# EAGLE board schema_7 (EAGLE 9.1.0)
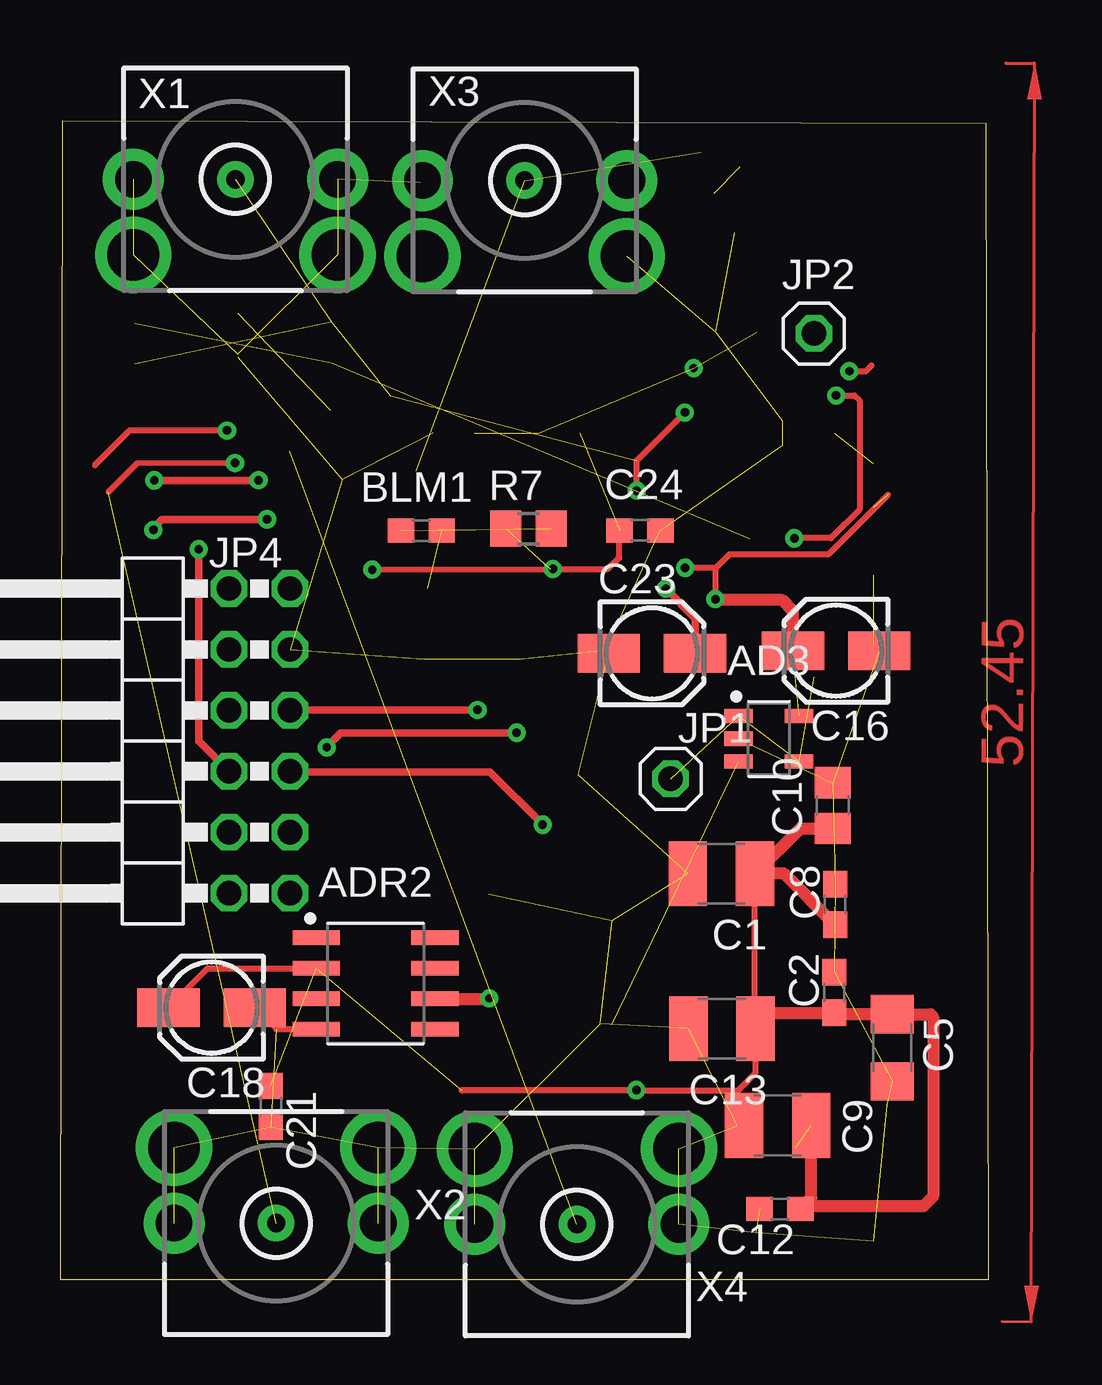
[diagram p0: board, top side]
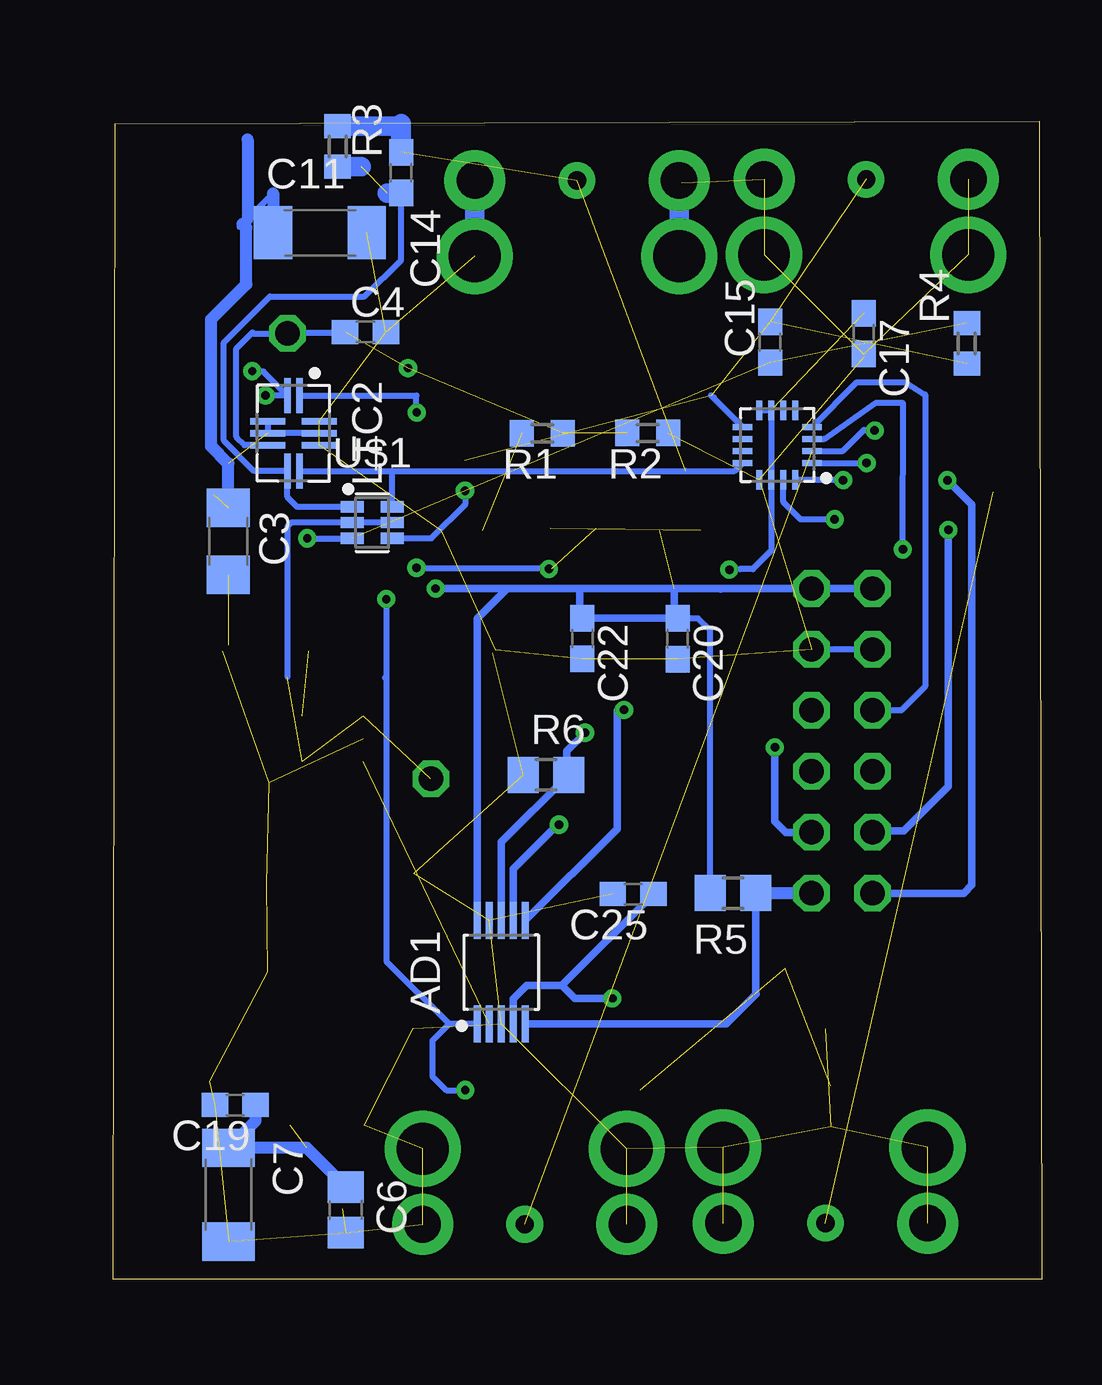
[diagram p1: board, bottom side, seen from below]

Size 38.69 x 48.26 mm. Coordinates in mm from the lower left corner, seen from the top.
Outline: 0,0 38.69,0 38.59,48.16 0.1,48.26 0,0
Copper layers (1*16): Top 0.035mm / dielectric 1.5mm / Bottom 0.035mm
Design rules "default": minimum track width 6mil, minimum drill 0.35mm, track to track 6mil, track to pad 6mil, pad to pad 6mil, via to via 6mil, smd to smd 6mil, copper to edge 40mil, drill to drill 6mil, minimum pad ring 10mil, minimum via ring 8mil, stop-mask expansion 4mil, vias tented up to drill 0mil, thermal gap 10mil

## Footprints (pad centres in the part's own frame; a part is rotated, then mirrored left to right if it is on the bottom)
SOP50P490X110-10 = smd 1.55 x 0.297: 1 -2.156,1; 2 -2.156,0.5; 3 -2.156,0; 4 -2.156,-0.5; 5 -2.156,-1; 6 2.156,-1; 7 2.156,-0.5; 8 2.156,0; 9 2.156,0.5; 10 2.156,1
SOT95P280X145-5 = smd 1.186 x 0.597: 1 -1.264,0.95; 2 -1.264,0; 3 -1.264,-0.95; 4 1.264,-0.95; 5 1.264,0.95
SOIC127P600X175-8 = smd 1.968 x 0.599: 1 -2.473,1.905; 2 -2.473,0.635; 3 -2.473,-0.635; 4 -2.473,-1.905; 5 2.473,-1.905; 6 2.473,-0.635; 7 2.473,0.635; 8 2.473,1.905
C1608 = smd 1.1 x 1: 1 -0.85,0; 2 0.85,0
C1210 = smd 1.6 x 2.7: 1 -1.4,0; 2 1.4,0
C0603 = smd 1.1 x 1: 1 -0.85,0; 2 0.85,0
C1206 = smd 1.6 x 1.8: 1 -1.4,0; 2 1.4,0
C0805 = smd 1.3 x 1.5: 1 -0.95,0; 2 0.95,0
C1808 = smd 1.6 x 2.2: 1 -1.95,0; 2 1.95,0
153CLV-0405 = smd 2.6 x 1.6: + 1.8,0; - -1.8,0
1X01 = drill 1.016 octagon: 1 0,0
2X06/90 = drill 1.016 octagon: 1 -6.35,-6.35; 2 -6.35,-3.81; 3 -3.81,-6.35; 4 -3.81,-3.81; 5 -1.27,-6.35; 6 -1.27,-3.81; 7 1.27,-6.35; 8 1.27,-3.81; 9 3.81,-6.35; 10 3.81,-3.81; 11 6.35,-6.35; 12 6.35,-3.81
QFN50P350X250X80-10 = smd 1.459 x 0.27: 1 -1.574,0.25; 2 -1.574,-0.25; 6 1.574,-0.25; 7 1.574,0.25 | smd 0.27 x 1.459: 3 -0.5,-1.074; 4 0,-1.074; 5 0.5,-1.074; 8 0.5,1.074; 9 0,1.074; 10 -0.5,1.074
R0603 = smd 1 x 1.1: 1 -0.85,0; 2 0.85,0
R0805 = smd 1.3 x 1.5: 1 -0.95,0; 2 0.95,0
QFN50P300X300X90-16 = smd 0.81 x 0.25: 1 -1.445,0.75; 2 -1.445,0.25; 3 -1.445,-0.25; 4 -1.445,-0.75; 9 1.445,-0.75; 10 1.445,-0.25; 11 1.445,0.25; 12 1.445,0.75 | smd 0.25 x 0.81: 5 -0.75,-1.445; 6 -0.25,-1.445; 7 0.25,-1.445; 8 0.75,-1.445; 13 0.75,1.445; 14 0.25,1.445; 15 -0.25,1.445; 16 -0.75,1.445
SOTFL65P210X100-6 = smd 0.956 x 0.472: 1 -0.836,0.65; 2 -0.836,0; 3 -0.836,-0.65; 4 0.836,-0.65; 5 0.836,0; 6 0.836,0.65
SMA-142-0701-871 = drill 0.762 pad 1.524: 1 0,0 | drill 1.524 pad 2.54: 2@1 -4.255,0; 2@2 4.255,0 | drill 2.159 pad 2.794: 2@3 -4.255,-3.15; 2@4 4.255,-3.15

## Placement (x,y rotation side)
AD1  0  [SOP50P490X110-10]  22.51,12.79 90 bottom
AD3  0  [SOT95P280X145-5]  29.54,22.53 0 top
ADR2  ADR441N  [SOIC127P600X175-8]  13.15,12.33 0 top
BLM1  0  [C1608]  15.06,31.21 180 top
C1  10u  [C1210]  27.55,16.9 180 top
C2  0.1u  [C0603]  32.27,11.96 90 top
C3  1000p  [C1206]  33.89,30.76 270 bottom
C4  0.1u  [C0603]  28.17,39.47 0 bottom
C5  1000p  [C1206]  34.68,9.65 270 top
C6  100p  [C0805]  29,2.89 270 bottom
C7  0.01u  [C1808]  33.88,3.53 270 bottom
C8  0.1u  [C0603]  32.3,15.62 90 top
C9  0.47u  [C1210]  29.9,6.41 180 top
C10  100p  [C0805]  32.2,19.74 90 top
C11  0.01u  [C1808]  30.07,43.62 0 bottom
C12  0.1u  [C0603]  30,2.93 180 top
C13  0.47u  [C1210]  27.58,10.45 180 top
C14  10p  [C0603]  26.69,46.12 90 bottom
C15  10p  [C0603]  11.31,39.05 90 bottom
C16  10u  [153CLV-0405]  32.33,26.19 180 top
C17  0.1u  [C0603]  7.42,39.41 270 bottom
C18  0.1u  [153CLV-0405]  6.32,11.32 180 top
C19  1u  [C0603]  33.6,7.27 180 bottom
C20  1u  [C0603]  15.17,26.69 270 bottom
C21  0.1u  [C0603]  8.78,7.21 270 top
C22  0.1u  [C0603]  19.14,26.7 270 bottom
C23  10u  [153CLV-0405]  24.67,26.09 0 top
C24  1u  [C0603]  24.17,31.22 0 top
C25  0.1u  [C0603]  17.02,16.05 180 bottom
JP1  0  [1X01]  25.45,20.86 180 top
JP2  0  [1X01]  31.41,39.42 0 top
JP4  0  [2X06/90]  3.23,22.44 90 top
LTC2  0  [QFN50P350X250X80-10]  31.18,35.26 270 bottom
R1  500  [R0603]  20.8,35.26 180 bottom
R2  500  [R0603]  16.41,35.27 180 bottom
R3  500  [R0603]  29.33,47.21 90 bottom
R4  500  [R0603]  3.12,39.01 270 bottom
R5  10k  [R0805]  12.86,16.09 180 bottom
R6  10k  [R0805]  20.65,21.03 0 bottom
R7  1.5  [R0805]  19.52,31.29 180 top
SY1  SY89873LN  [QFN50P300X300X90-16]  11.01,34.77 180 bottom
U$1  UM6K34N1  [SOTFL65P210X100-6]  27.9,31.54 0 bottom
X1  SMA-142-0701-871/880  [SMA-142-0701-871]  7.31,45.85 0 top
X2  SMA-142-0701-871/880  [SMA-142-0701-871]  9.01,2.34 180 top
X3  SMA-142-0701-871/880  [SMA-142-0701-871]  19.36,45.8 0 top
X4  SMA-142-0701-871/880  [SMA-142-0701-871]  21.54,2.29 180 top

## Library data of the parts
AD1 AD3 ADR2 BLM1 LTC2 SY1 U$1 = mylibrary
C1-C3 C5-C13 = rcl
C4 C14 C15 C17-C22 C24 C25 = rcl; SPICEPREFIX: C
C16 C23 R3 R4 = resistor
JP1 JP2 JP4 = pinhead
R1 R2 R5-R7 = rcl; SPICEPREFIX: R
X1-X4 = con-coax; MF: JOHNSON COMPONENTS; MPN: 142-0701-871; OC_FARNELL: 1339835; OC_NEWARK: 91B6105

## Nets
0: AD1.3 AD1.9 AD3.2 ADR2.4 C1.2 C2.2 C3.2 C4.2 C5.2 C6.2 C7.2 C8.2 C9.2 C10.2 C11.2 C12.2 C13.2 C16.- C17.2 C18.- C19.2 C20.2 C21.2 C22.2 C23.- C24.2 C25.2 JP4.9 JP4.10 LTC2.8 LTC2.10 R2.1 R6.1 SY1.13 X1.2@1 X1.2@2 X1.2@3 X1.2@4 X2.2@1 X2.2@2 X2.2@3 X2.2@4 X3.2@1 X3.2@2 X3.2@3 X3.2@4 X4.2@1 X4.2@2 X4.2@3 X4.2@4
3IN+: AD1.2 AD3.3
+3V3: AD1.1 AD3.5 ADR2.2 C1.1 C2.1 C3.1 C5.1 C6.1 C7.1 C8.1 C9.1 C10.1 C11.1 C12.1 C13.1 C16.+ C17.1 C18.+ C19.1 C21.1 C24.1 LTC2.3 LTC2.4 LTC2.9 R1.2 R7.2 SY1.7 SY1.8 SY1.14
CS: AD1.5 JP4.1 R5.1
DIN: AD1.7 JP4.5
DVDD: AD1.10 BLM1.1 C20.1 C22.1 C23.+ JP4.11 JP4.12 R5.2
IN: C14.2 LTC2.7 R3.2 SY1.12 U$1.6 X3.1
INN: C15.2 LTC2.1 R4.2 SY1.9 U$1.4 X1.1
LDAC: AD1.8 JP4.3 R6.2
LIN+: C15.1 LTC2.2 R4.1 U$1.3
LIN-: C14.1 LTC2.6 R3.1 U$1.1
N$7: BLM1.2 R7.1
QB0: SY1.1 X2.1
QB0N: SY1.2 X4.1
QB1: JP4.6 SY1.3
QB1N: JP4.8 SY1.4
S0: JP4.2 SY1.16
S1: JP4.4 SY1.15
SCLK: AD1.6 JP4.7
VCTRL: AD3.1 AD3.4 JP1.1 U$1.2 U$1.5
VOCM: C4.1 JP2.1 LTC2.5 R1.1 R2.2
VREF2V5: AD1.4 ADR2.6 C25.1

## Tracks (layer width: path | path; a pad name or v marks a point on that pad's centre or on a via)
0  (45 unrouted)
  Top 0.254: 22.74,26.22 C23.- | C18.- 9.01,10.42 ADR2.4
  Top 0.305: 24.99,31.19 C24.2
  Top 0.508: 28.21,6.41 C9.2 | 33.89,26.44 C16.-
  Bottom 0.254: JP4.10 JP4.9 | 28.14,43.6 C11.2
  Bottom 0.305: C22.2
  Bottom 0.813: X3.2@4 X3.2@2 | X3.2@3 X3.2@1 15,45.7 | 7.42,38.44 C17.2
3IN+  (1 unrouted)
+3V3  (via drill 0.35)  (9 unrouted)
  Top 0.254: v13.01,29.58 20.43,29.6 20.43,29.61 v20.53,29.61 22.83,29.61 23.3,30.08 C24.1 | C18.+ 4.56,11.36 6.16,12.96 ADR2.2 | 16.74,7.88 16.75,7.86 16.77,7.88 v24.02,7.88 28.26,7.88 28.98,8.61 C13.1 28.95,10.48 C1.1 | 27.33,29.65 26.13,29.65 v26.05,29.65 | 27.33,29.65 27.31,29.63 v27.31,28.35 | 34.5,32.7 32.03,30.22 27.9,30.22 27.33,29.65
  Top 0.508: C10.1 30.84,18.79 C1.1 30.17,16.9 C8.1 | C13.1 29.64,11.11 32,11.11 | 32,11.11 C2.1 32.25,11.09 | C12.1 31.3,3.38 | 31.3,3.38 C9.1 | v27.31,28.35 27.34,28.32 30.07,28.32 30.53,27.86 C16.+ | 32,11.11 32.06,11.05 C5.1 36.26,11.05 36.38,10.93 36.38,3.45 35.98,3.05 31.61,3.05 31.3,3.05 31.3,3.38
  Bottom 0.254: SY1.8 SY1.7 SY1.14 11.26,30.36 12.03,29.6 12.57,29.6 v13.01,29.58 | 23.53,10.62 AD1.1 24.69,10.64 | v24.02,7.88 24.8,7.88 25.38,8.47 25.38,9.94 24.69,10.64 | LTC2.9 30.23,35.26 | 30.23,35.26 30.55,35.26 | 30.55,35.26 LTC2.4 LTC2.3 | 30.35,35.25 30.23,35.26 | 30.55,35.27 30.55,35.26 | v26.05,29.65 20.58,29.65 v20.53,29.61 | v27.31,28.35 27.31,25.13 | 27.31,25.13 27.31,13.25 24.69,10.64 | 27.36,25.08 27.31,25.13 | 33.42,43.87 33.3,43.98 33.09,44.2 32.02,45.27
  Bottom 0.508: 33.09,47.5 33.09,44.2 | 32.02,45.27 C11.1 | C6.1 30.63,5.48 C7.1 32.75,6.61 C19.1 | C3.1 33.89,34 34.61,34.72 34.61,40.01 33.14,41.48 33.14,43.82 33.3,43.98
CS
  Bottom 0.305: AD1.5 13.14,10.64 11.88,11.9 11.91,11.93 R5.1
  Bottom 0.508: R5.1 JP4.1
DIN  (via drill 0.35)
  Top 0.305: JP4.5 9.61,21.14 17.91,21.14 v20.11,18.95
  Bottom 0.305: AD1.7 22.01,17.11 20.2,18.92 20.14,18.92 v20.11,18.95
DVDD  (via drill 0.35)  (1 unrouted)
  Top 0.305: v25.25,28.79 26.47,27.54 C23.+
  Bottom 0.254: 13.36,28.77 13.36,28.79 | R5.2 13.81,27.05 14.31,27.54 C20.1
  Bottom 0.305: JP4.12 JP4.11 11.84,28.79 13.36,28.79 | AD1.10 23.51,27.55 22.27,28.79 | C20.1 C22.1 19.24,27.65 19.24,28.79 | C20.1 15.35,27.72 | 22.27,28.79 19.24,28.79 | 19.24,28.79 15.32,28.79 | 15.32,28.79 14.62,28.79 14.02,28.79 13.38,28.79 13.36,28.77 | C20.1 15.32,27.69 15.32,28.79 | 22.27,28.79 v25.24,28.79 | v25.24,28.79 25.26,28.77 | v25.24,28.79 25.23,28.8 v25.25,28.79
IN  (2 unrouted)
  Bottom 0.254: LTC2.7 27.06,33.69 | 27.06,33.69 14.84,33.69 12.79,33.69 SY1.12 | U$1.6 27.06,33.69 | 27.06,33.69
  Bottom 0.813: 26.69,47.58 26.69,48.17 26.8,48.06 R3.2 | 26.69,47.58 26.69,47.52 C14.2 | 26.71,47.56 26.69,47.58
INN  (via drill 0.35)  (4 unrouted)
  Top 0.254: v24.03,32.87 24.03,34.12 26.04,36.14 v26.03,36.13
  Bottom 0.254: LTC2.1 26.05,36.84 26.05,36.15 v26.03,36.13 | 13.77,36.84 13.66,36.73 | 13.66,36.73 SY1.9 | 13.65,36.75 13.66,36.73 | U$1.4 25.43,30.89 24,32.32 24,32.84 v24.03,32.87 | v24.03,32.87
LDAC  (via drill 0.35)
  Top 0.305: v19.02,22.78 11.69,22.78 11.15,22.23 11.15,22.2 v11.12,22.17
  Bottom 0.305: R6.2 19.79,20.94 | 19.79,20.94 22.51,18.22 AD1.8 | 19.25,22.78 v19.02,22.78 19.79,22.01 19.79,20.94 | v11.12,22.17 11.12,19.08 10.67,18.63 JP4.3
LIN+  (via drill 0.35)  (2 unrouted)
  Top 0.254: v32.34,36.84 33.1,36.84 33.32,36.61 33.32,32.09 32.12,30.89 30.78,30.89 30.75,30.89 v30.6,30.89 v30.6,30.88 | v32.89,37.85 33.57,37.85 33.81,38.09
  Bottom 0.254: 32.38,36.84 LTC2.2 32.43,37.84 32.88,37.84 v32.89,37.85 | 32.38,36.84 | 32.38,36.84 32.37,36.84 v32.34,36.84 | v30.6,30.88 28.74,30.88 U$1.3
LIN-  (1 unrouted)
  Bottom 0.254: U$1.1 31.01,32.19 31.43,32.61 LTC2.6 32.82,33.69 34.07,34.95 34.07,39.04 32.16,40.96 28.22,40.96 26.69,42.48 C14.1
  Bottom 0.813: C14.1 27.26,45.27 | 28.35,46.36 R3.1
N$7  (1 unrouted)
QB0  (via drill 0.35)  (1 unrouted)
  Top 0.254: v7.29,34.02 3.2,34 2.02,32.82
  Bottom 0.254: SY1.1 7.25,34.02 7.26,34.02 v7.29,34.02
QB0N  (via drill 0.35)  (1 unrouted)
  Top 0.254: v6.96,35.38 2.89,35.38 1.45,33.93
  Bottom 0.254: SY1.2 8.28,34.52 7.41,35.4 6.98,35.4 v6.96,35.38
QB1  (via drill 0.35)
  Top 0.305: v5.78,30.42 5.78,22.43 JP4.6
  Bottom 0.254: v5.78,30.42 5.81,30.45 5.8,36.53 6.91,36.53 9.06,35.02 SY1.3
QB1N
  Bottom 0.254: JP4.8 5.85,23.71 4.86,24.7 4.86,36.88 4.87,36.88 5.67,37.39 7.7,37.39 SY1.4
S0  (via drill 0.35)
  Top 0.305: v3.93,33.3 8.17,33.3 8.18,33.29 8.25,33.29 v8.27,33.3
  Bottom 0.254: v8.27,33.3 10.24,33.3 SY1.16
  Bottom 0.305: JP4.2 3.25,16.09 2.91,16.43 2.91,32.28 3.9,33.27 | 3.9,33.27 | 3.9,33.27 v3.93,33.3
S1  (via drill 0.35)
  Top 0.305: v8.63,31.67 4.24,31.67 3.93,31.36 3.93,31.27 v3.89,31.23
  Bottom 0.254: v8.63,31.67 10.05,31.67 10.76,32.39 10.76,32.42 SY1.15
  Bottom 0.305: 8.65,31.7 v8.63,31.67 | v3.89,31.23 3.89,20.53 5.74,18.68 6.99,18.68 JP4.4
SCLK  (via drill 0.35)
  Top 0.305: JP4.7 9.62,23.74 9.63,23.73 v17.4,23.73
  Bottom 0.305: AD1.6 17.68,18.78 17.68,23.7 17.43,23.7 v17.4,23.73
VCTRL  (3 unrouted)
  Top 0.254: 25.46,20.84 JP1.1
  Bottom 0.254: U$1.5 U$1.2 30.33,31.54 31.26,31.54 31.42,31.38 31.42,25.1
VOCM  (via drill 0.35)  (3 unrouted)
  Bottom 0.254: 29.04,39.45 30.93,39.45 30.96,39.42 JP2.1 32.84,39.42 32.88,39.46 33.55,38.8 33.55,35.1 33.21,34.76 LTC2.5 | 29.04,39.45 C4.1 | 29.02,39.43 29.04,39.45
  other vias: 26.4,37.98
VREF2V5  (via drill 0.35)
  Top 0.508: ADR2.6 17.65,11.69 17.66,11.7 v17.88,11.7 v17.89,11.71
  Bottom 0.305: C25.1 19.99,12.24 | 19.99,12.24 21.46,12.24 22.01,11.68 AD1.4 | v17.89,11.71 19.46,11.71 19.99,12.24
(copper drawn outside any net)
  shapes: Top area x2